# Altium PCB Controller.PcbDoc
Units mil, origin at the board's own origin, x right, y up, seen from the top; angles counter-clockwise.
Board outline 1365 x 1010 mil, 2 copper layers (Top Layer, Bottom Layer), stack 61.756 mil thick; 91 components, 54 nets, 229 pads, 266 vias.
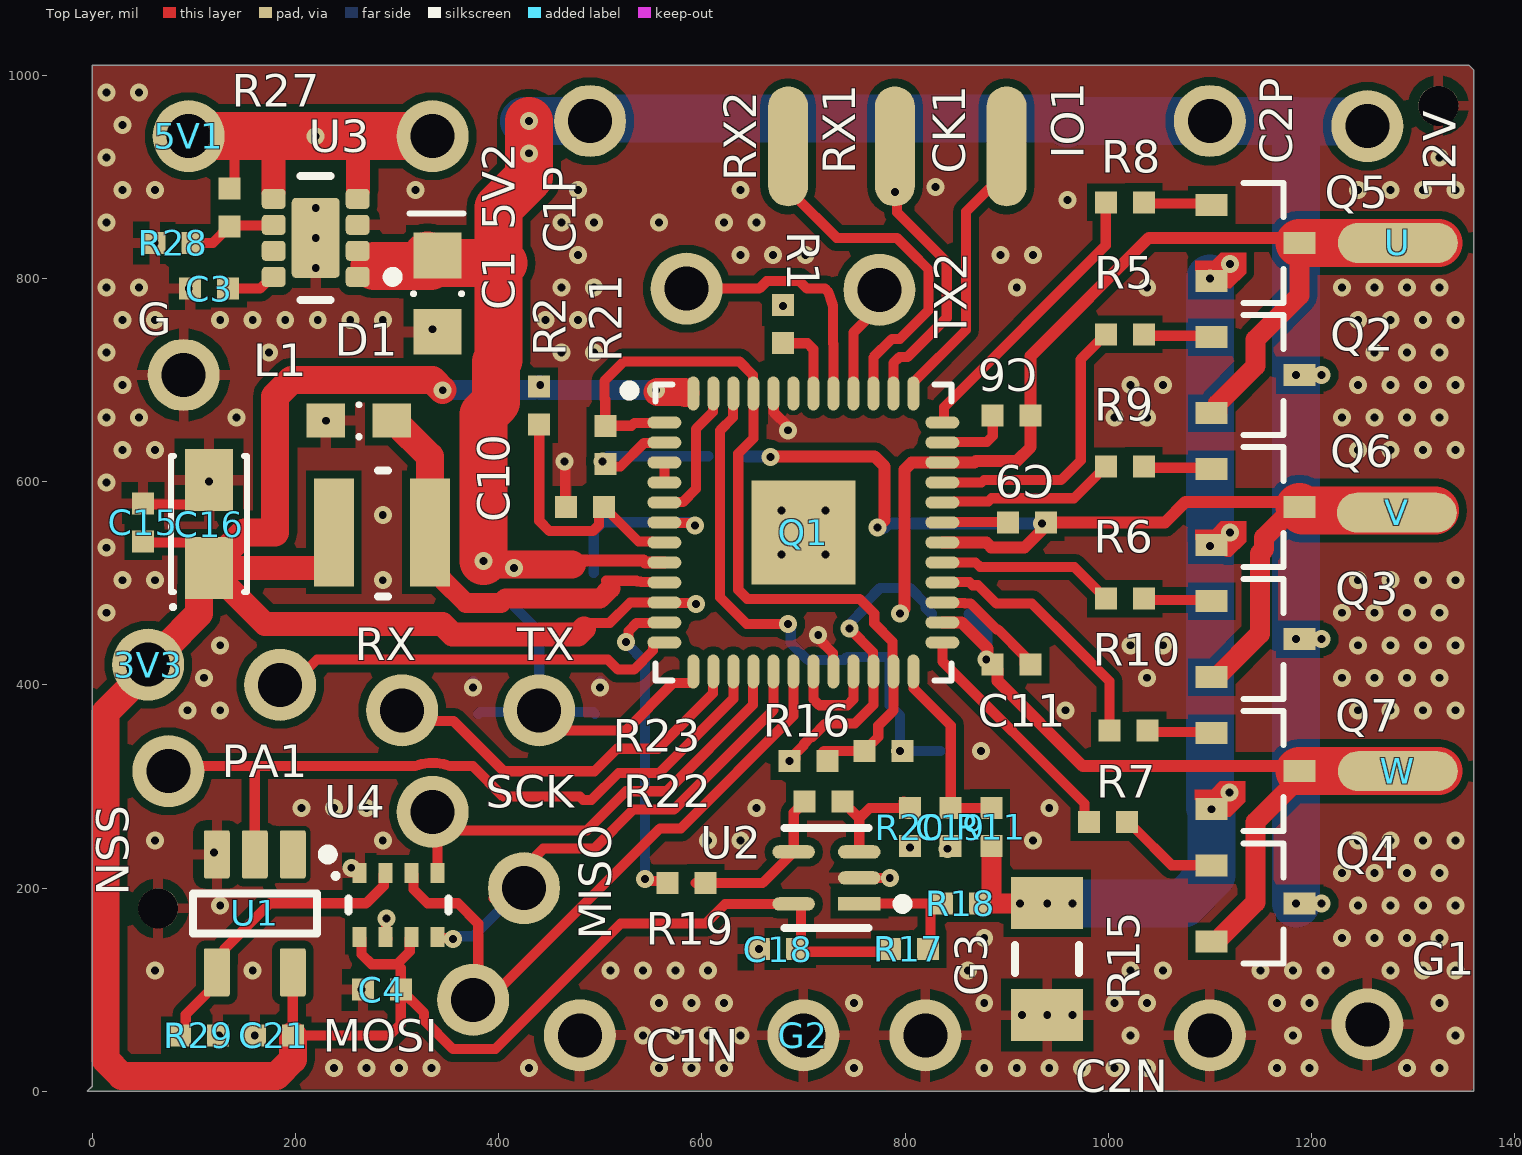
[diagram p0: Top Layer view]
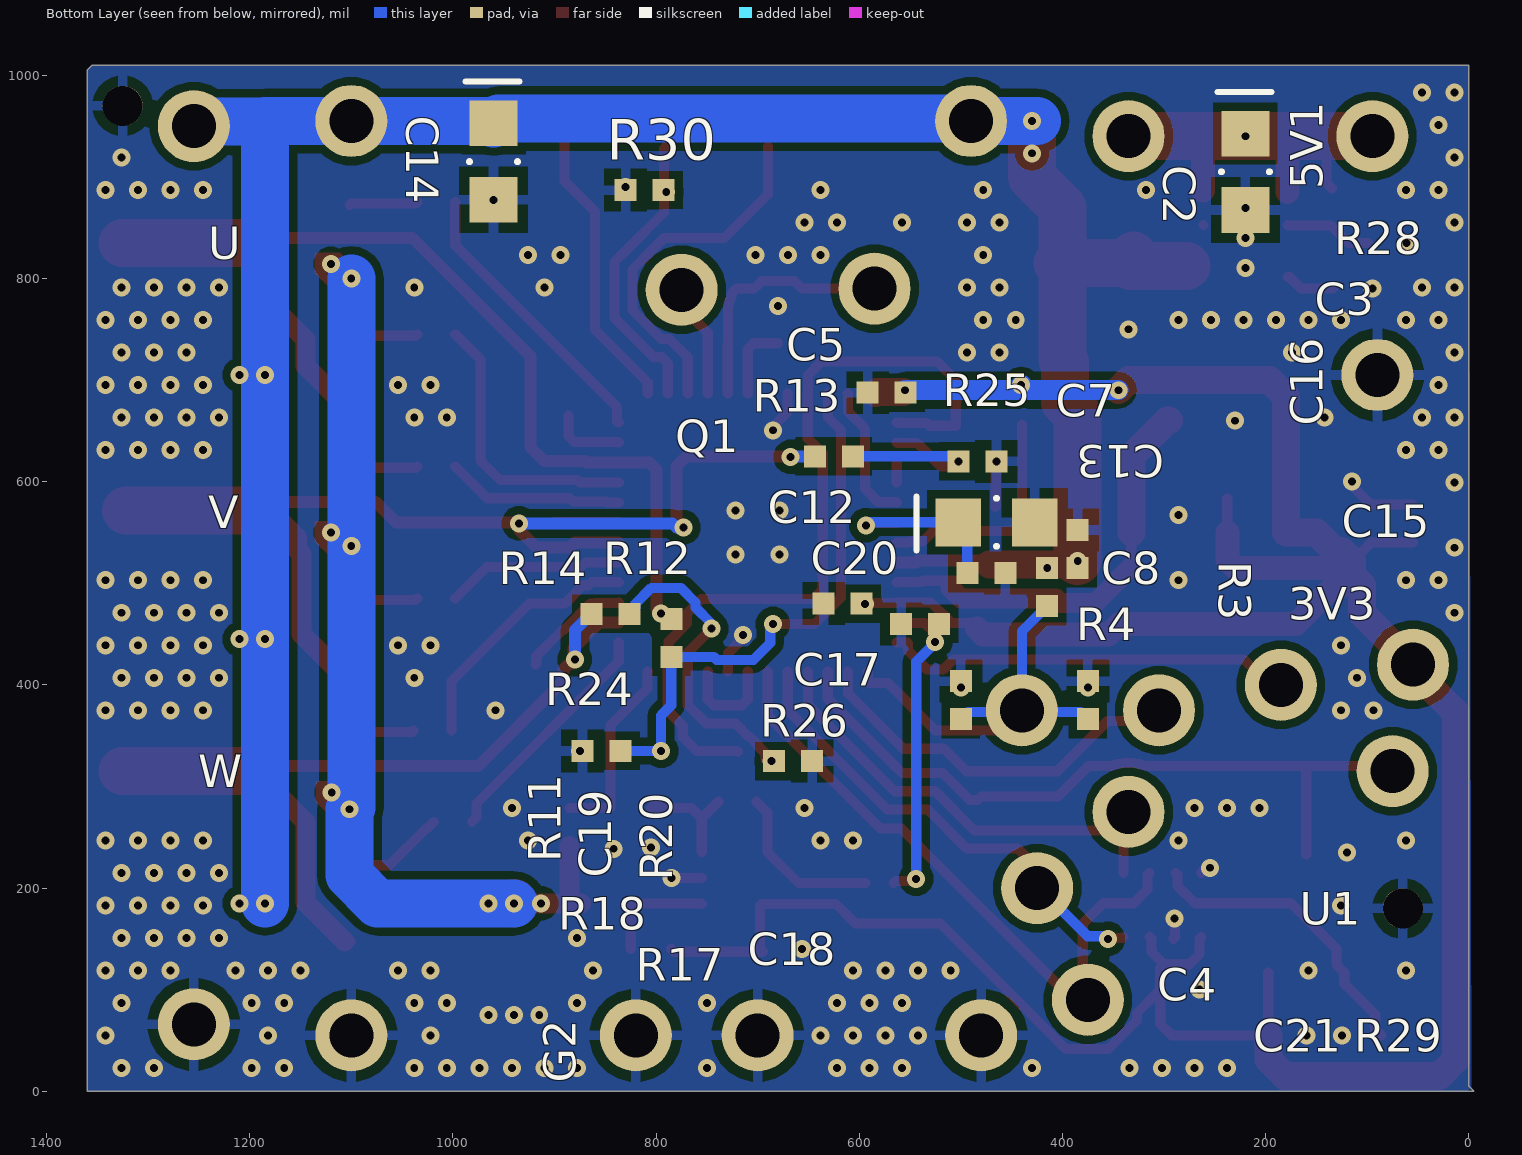
[diagram p1: Bottom Layer view, seen from below]

## Layer stack, top to bottom
Top Solder: solder mask 1, SM-001, Dk 4
Top Layer: signal copper 1.378
Dielectric 1: core 59, Core-043, Dk 4.3
Bottom Layer: signal copper 1.378
Bottom Solder: solder mask 1, SM-001, Dk 4

## Board outline
-5,0 0,5 0,1010 1355,1010 1360,1005 1360,0

## Design rules (kind name [scope] priority, off if disabled: settings)
Clearance Clearance_5 [InNetClass('RF') vs InNet('NetC28_1')] p1: gap=7.87 ignorepadtopadclearanceinfootprint=TRUE
Clearance Clearance_4 [InNetClass('RF') vs InNet('VDD_RFS')] p2: gap=7.87 ignorepadtopadclearanceinfootprint=TRUE
Clearance Clearance_3 [HasFootprint('vqfn28_6x6mm') vs InNet('VDD_RFS')] p3: gap=7.87 ignorepadtopadclearanceinfootprint=TRUE
Clearance Clearance_2 [((Not InAnyNet) And IsPad) vs InNet('GND')] p4: gap=4.72 ignorepadtopadclearanceinfootprint=FALSE
Clearance [InNetClass('RF') vs InNet('GND')] p5: gap=4.72 ignorepadtopadclearanceinfootprint=TRUE except(9.84: SMDPad-SMDPad SMDPad-THPad SMDPad-Via SMDPad-Fill SMDPad-Poly SMDPad-Region SMDPad-Text)
Clearance Clearance_1 [All] p6: gap=7.87 ignorepadtopadclearanceinfootprint=TRUE
MinimumSolderMaskSliver [All] p1: minsoldermaskwidth=0
PlaneClearance [InNetClass('RF')] p1: clearance=4.72
PolygonConnect PolygonConnect_1 [IsVia vs InNet('GND')] p1: connectstyle=Direct reliefconductorwidth=10 reliefentries=4 polygonreliefangle="90 Angle" airgapwidth=10
PolygonConnect [All] p2: connectstyle=Relief reliefconductorwidth=10 reliefentries=4 polygonreliefangle="90 Angle" airgapwidth=10
RoutingVias [All] p1: holewidth=7.8 width=17.7 viastyle="Through Hole" minholewidth=7.8 minwidth=17.7 maxholewidth=7.8 maxwidth=17.7
SilkToSolderMaskClearance [IsPad] p1: minsilkscreentomaskgap=6 clearancetoexposedcopper=TRUE
SolderMaskExpansion SolderMaskExpansion_1 [IsVIA] p1: expansion=4 istentingtop=TRUE
SolderMaskExpansion [All] p2: expansion=4 istentingtop=FALSE
Width Width_2 [InNetClass('hc')] p1: maxlimit=78.74 minlimit=11.81 preferedwidth=47.24
Width [All] p2: maxlimit=78.74 minlimit=10 preferedwidth=10
27 further rules are at their usual default settings.

## Classes and differential pairs
net class short: HSU HSV HSW LSU LSV LSW NetD1_2 NetQ2_G NetQ3_G NetQ4_G NetQ5_G NetQ6_G NetQ7_G
net class hc: NetQ5_S OUTU OUTV OUTW VBUS
component class esc: 3V3 5V1 5V2 12V C1 C1N C1P C2 C2N C2P C3 C4 C5 C6 C7 C8 C9 C10 C11 C12 C13 C14 C15 C16 C17 C21 CK1 D1 G G1 G2 G3 IO1 L1 MISO MOSI NSS PA1 q Q1 R1 R2 R3 R4 R27 R28 R29 R30 RX RX1 RX2 SCK TX TX2 U1 U3 U4
component class drivers: C18 C19 C20 Q2 Q3 Q4 Q5 Q6 Q7 R5 R6 R7 R8 R9 R10 R11 R12 R13 R14 R15 R16 R17 R18 R19 R20 R21 R22 R23 R24 R25 R26 U U2 V W

## Components (designator, comment, footprint, x,y, rotation, side; value= is the part's Value field where it differs from the comment)
3V3 "3V3" large_pin 55,420 r180 top
5V1 "5V1" large_pin 95,940 r90 top
5V2 "5V2" large_pin 335,940 r180 top
12V "12V" large_pin 1255,950 r90 top
C1 "TCJB226M025R0150" my_0805_pol 340,785 r270 top value="22uF 25V"
C1N "C1N" large_pin 480,55 r90 top
C1P "C1P" large_pin 490,955 r90 top
C2 "TCJB226M025R0150" my_0805_pol 220,905 r270 bottom value="22uF 25V"
C2N "C2N" large_pin 1100,55 r180 top
C2P "C2P" large_pin 1100,955 r180 top
C3 "3.3nF" MY_0402#1 115,790 r0 top value=4.7nF
C4 "100nF" MY_0402#1 285,100 r180 top
C5 "100nF" MY_0402#1 573.03,687.57 r180 bottom
C6 "470nF/25V" MY_0402#1 905,665 r0 top value=470nF
C7 "" MY_0805_pol 465,560 r180 bottom value="22uF 25V"
C8 "100nF" MY_0402#1 475,510 r0 bottom
C9 "470nF/25V" MY_0402#1 920,560 r0 top value=470nF
C10 "3.3nF" MY_0402#1 485,575 r180 top value=100nF
C11 "470nF/25V" MY_0402#1 905,420 r180 top value=470nF
C12 "100nF" MY_0402#1 616.3,480 r0 bottom
C13 "220nF/25V" MY_0402#1 385,533.7 r90 bottom value=100nF
C14 "" my_0805_pol 960,915 r270 bottom value="22uF 25V"
C15 "100nF" MY_0402#1 50,560 r270 top
C16 "" my_1206_pol 115,558.31 r90 top value="47uF 6.3V"
C17 "10nF" MY_0402#1 500,385 r90 bottom value=4.7nF
C18 "100nF" MY_0402#1 675,140 r180 top
C19 "10nF" MY_0402#1 845,260 r90 top
C20 "10nF" MY_0402#1 540,460 r180 bottom
C21 "100nF" MY_0402#1 178.7,55 r180 top
CK1 "CK" solder_pin_small 790,930 r180 top
D1 "CD0603-B0340R" my_0603 262.52,660 r0 top
G "G" large_pin 90,705 r180 top
G1 "G" large_pin 1255,65.85 r0 top
G2 "G" large_pin 700,55 r0 top
G3 "G" large_pin 820,55 r0 top
IO1 "IO" solder_pin_small 900,930 r180 top
L1 "74404032220" IND_3_3 285,550 r0 top value="22uH 0.6A"
MISO "MISO" large_pin 425,200 r180 top
MOSI "MOSI" large_pin 375,90 r180 top
NSS "NSS" large_pin 75,315 r180 top
PA1 "PA1" large_pin 185,400 r90 top
Q1 "STSPIN32F0A" VFQFPN48 700,550 r0 top
Q2 "IRLML0030TRPBF" Micro3 1145,705 r0 top
Q3 "IRLML0030TRPBF" Micro3 1145,445 r0 top
Q4 "IRLML0030TRPBF" Micro3 1145,185 r0 top
Q5 "IRLML0030TRPBF" Micro3 1145,835 r0 top
Q6 "IRLML0030TRPBF" Micro3 1145,575 r0 top
Q7 "IRLML0030TRPBF" Micro3 1145,315 r0 top
R1 "0R" MY_0402#1 680,755 r270 top value=10K
R2 "39k" MY_0402#1 440,675 r270 top value=10K
R3 "470k" MY_0402#1 415,496.3 r90 bottom value=10K
R4 "33k" MY_0402#1 375,385 r270 bottom value=10K
R5 "47" MY_0402#1 1016.3,745 r0 top value=50
R6 "47" MY_0402#1 1016.3,485 r0 top value=50
R7 "47" MY_0402#1 1000,265 r0 top value=50
R8 "47" MY_0402#1 1016.3,875 r0 top value=50
R9 "47" MY_0402#1 1016.3,615 r0 top value=50
R10 "47" MY_0402#1 1020,355 r0 top value=50
R11 "1k" MY_0402#1 885,260 r270 top value=50
R12 "10k" MY_0402#1 785,446.3 r90 bottom value=50
R13 "10k" MY_0402#1 625,625 r0 bottom value=50
R14 "10k" MY_0402#1 845,470 r0 bottom value=50
R15 "0.001 1206" MY_1206 940,130.12 r270 top value=50
R16 "10k" MY_0402#1 778.7,335 r180 top value=50
R17 "470k" MY_0402#1 803.7,140 r180 top value=50
R18 "180k" MY_0402#1 855,185 r0 top value=50
R19 "10k" MY_0402#1 585,205 r0 top value=50
R20 "1k" MY_0402#1 805,260 r270 top value=50
R21 "10k" MY_0402#1 505,636.3 r90 top value=50
R22 "24k" MY_0402#1 720,285 r0 top value=50
R23 "10k" MY_0402#1 705,325 r0 top value=50
R24 "1k" MY_0402#1 853.7,335 r180 bottom value=50
R25 "1k" MY_0402#1 483.7,620 r0 bottom value=50
R26 "1k" MY_0402#1 665,325 r0 bottom value=50
R27 "270k" MY_0402#1 135,870 r270 top value=10K
R28 "47k" MY_0402#1 80,835 r0 top value=10K
R29 "33k" MY_0402#1 105,55 r0 top value=10K
R30 "0R" MY_0402#2 811.3,887 r0 bottom value=10K
RX "RX" large_pin 305,375 r90 top
RX1 "RX" solder_pin_small 684.98,930 r180 top
RX2 "PA1" large_pin 585,790 r180 top
SCK "SCK" large_pin 335,275 r180 top
TX "RX" large_pin 440,375 r90 top
TX2 "TX2" large_pin 774.85,788.8 r180 top
U "U" solder_pin_small 1285,835 r270 top
U1 "SN74LVC1G04MDBVREP" DBV0005A_M 160,175 r270 top
U2 "LMV321LICT" FP-SOT323-5-IPC_C 722.72,210 r180 top
U3 "TPS82150SILR" FP-SIL0008D-MFG 220,840 r180 top
U4 "BMP280" BOSC-LGA-8_V 301.61,183.5 r0 top
V "V" solder_pin_small 1284.05,569.46 r90 top
W "W" solder_pin_small 1285,315 r90 top

## Footprints (in the part's own frame and the unit in brackets; to place one, negate y for a bottom-side part, rotate by r counter-clockwise, add the part's x,y. Pads: shape width x height; smd on the part's side, far side on the other; paste and mask are expansions set on the pad)
BOSC-LGA-8_V [mm] "LGA, 8-Leads, Body 2.5x2mm, Pitch 0.65mm"
  rect 0.35x0.5 smd: 1(-0.975,0.8) 2(-0.325,0.8) 3(0.325,0.8) 4(0.975,0.8) 5(0.975,-0.8) 6(0.325,-0.8) 7(-0.325,-0.8) 8(-0.975,-0.8)
  silkscreen extent -1.64,-0.16 1.25,0.79, body extent -1.25,-1 1.25,1, height 1
DBV0005A_M [mm] "SOT23, 5-Leads, Body 3.05x1.75mm, Pitch 0.95mm, IPC Low Density"
  rrect15% 1.2x0.65 smd: 1(-1.475,0.95) 2(-1.475,0) 3(-1.475,-0.95) 4(1.475,-0.95) 5(1.475,0.95)
  silkscreen extent -1.6,-1.55 0.5,1.95, body extent -1.42,-1.46 1.42,1.46, height 1.08
FP-SIL0008D-MFG [mm]
  rrect40% 0.6x0.5 smd: 1(-1.05,0.975) 2(-1.05,0.325) 3(-1.05,-0.325) 4(-1.05,-0.975) 5(1.05,-0.975) 6(1.05,-0.325) 7(1.05,0.325) 8(1.05,0.975)
  rrect17% 1.2x2 smd: 9(0,0)
  silkscreen extent -2.05,-1.55 0.38,1.55, body extent -1.55,-1.65 1.55,1.65, height 0.25
FP-SOT323-5-IPC_C [mm]
  rect 1.064x0.336 smd: 1(-0.82,0.65)
  rrect100% 1.064x0.336 smd: 2(-0.82,0) 3(-0.82,-0.65) 4(0.82,-0.65) 5(0.82,0.65)
  silkscreen extent -2.03,-1.25 1.05,1.25, body extent -1.45,-1.1 1.45,1.1, height 0.25
IND_3_3 [mm]
  rect 1x2.7 smd: 1(-1.2,0) 2(1.2,0)
  silkscreen extent -0.1,-1.6 0.15,1.55, body extent -2,-1.65 2,1.65, height 2.5
large_pin [mm]
  round 1.8 hole 1.1: 1(0,0)
Micro3 [mm] "SOT23, 3-Leads, Body 2.92x2.37mm, Pitch 0.95mm, IPC High Density"
  rect 0.8x0.55 smd: D(1.1,0) G(-1.1,0.95) S(-1.1,-0.95)
  silkscreen extent -0.3,-1.5 0.7,1.5, body extent -1.32,-1.52 1.32,1.52, height 1.12
MY_0402#1 [mm] "Chip Resistor, 2-Leads, Body 1.00x0.50mm, IPC Medium Density"
  rect 0.55x0.55 smd: 1(-0.475,0) 2(0.475,0)
  body extent -0.5,-0.25 0.5,0.25, height 0.5
MY_0402#2 [mm] "Chip Resistor, 2-Leads, Body 1.00x0.50mm, IPC Medium Density"
  rect 0.55x0.55 smd mask+0: 1(-0.475,0) 2(0.475,0)
  body extent -0.5,-0.25 0.5,0.25, height 0.5
my_0603 [mm] "0603 without silkscreen issues"
  rect 0.965x0.85 smd: 1(-0.825,0) 2(0.825,0)
  silkscreen extent -0.01,-0.41 0.01,0.41, body extent -0.8,-0.4 0.8,0.4, height 3
my_0805_pol [mm] "0805 without silkscreen issues"
  rect 1.14x1.2 smd: 1(-0.955,0) 2(0.955,0)
  silkscreen extent -2,-0.7 0.01,0.65, body extent -1,-0.6 1,0.6, height 4
MY_0805_pol [mm] "0805 without silkscreen issues"
  rect 1.14x1.2 smd: 1(-0.955,0) 2(0.955,0)
  silkscreen extent -2,-0.7 0.01,0.65, body extent -1,-0.6 1,0.6, height 4
MY_1206 [mm]
  rect 1.3x1.8 smd: 1(-1.4,0) 2(1.4,0)
  silkscreen extent -0.35,-0.8 0.35,0.8, body extent -1.7,-0.9 1.7,0.9, height 0.5
my_1206_pol [mm] "Molded Capacitor, 2-Leads, Body 3.20x1.65mm, IPC High Density"
  rect 1.55x1.2 smd: 1(-1.1,0) 2(1.1,0)
  silkscreen extent -2.12,-0.95 1.7,0.95, body extent -1.7,-0.9 1.7,0.9, height 1.6
solder_pin_small [mm] "pin for soldering"
  oval 1x3 smd: 1(0,0)
VFQFPN48 [mm] "QFN, 48-Leads, Body 7.00x7.00mm, Pitch 0.50mm, Thermal Pad 2.60x2.60mm, IPC Medium Density"
  oval 0.85x0.3 smd: 1(-3.475,2.75) 2(-3.475,2.25) 3(-3.475,1.75) 4(-3.475,1.25) 5(-3.475,0.75) 6(-3.475,0.25) 7(-3.475,-0.25) 8(-3.475,-0.75) 9(-3.475,-1.25) 10(-3.475,-1.75) 11(-3.475,-2.25) 12(-3.475,-2.75) 25(3.475,-2.75) 26(3.475,-2.25) 27(3.475,-1.75) 28(3.475,-1.25) 29(3.475,-0.75) 30(3.475,-0.25) 31(3.475,0.25) 32(3.475,0.75) 33(3.475,1.25) 34(3.475,1.75) 35(3.475,2.25) 36(3.475,2.75)
  oval 0.3x0.85 smd: 13(-2.75,-3.475) 14(-2.25,-3.475) 15(-1.75,-3.475) 16(-1.25,-3.475) 17(-0.75,-3.475) 18(-0.25,-3.475) 19(0.25,-3.475) 20(0.75,-3.475) 21(1.25,-3.475) 22(1.75,-3.475) 23(2.25,-3.475) 24(2.75,-3.475) 37(2.75,3.475) 38(2.25,3.475) 39(1.75,3.475) 40(1.25,3.475) 41(0.75,3.475) 42(0.25,3.475) 43(-0.25,3.475) 44(-0.75,3.475) 45(-1.25,3.475) 46(-1.75,3.475) 47(-2.25,3.475) 48(-2.75,3.475)
  rect 2.6x2.6 smd: EPAD(0,0)
  silkscreen extent -4.47,-3.7 3.7,3.7, body extent -3.55,-3.55 3.55,3.55, height 0.95

## Part data
3V3 5V1 5V2 12V C1N C1P C2N C2P CK1 G G1 G2 G3 IO1 MISO MOSI NSS PA1 RX RX1 RX2 SCK TX TX2 U V W: library part Socket, "Socket", LatestRevisionDate=17-Jul-2002, LatestRevisionNote="Re-released for DXP Platform.", Publisher="Altium Limited"
C1 C2 C7 C14 C16: library part "Cap Pol3", "Polarized Capacitor (Surface Mount)", LatestRevisionDate=29-May-2009, LatestRevisionNote="IPC-7351 Footprint Added.", PackageDescription="Chip Capacitor", PackageReference=C0805, Published=8-Jun-2000, Publisher="Altium Limited"
C3 C4 C5 C6 C8 C9 C10 C11 C12 C13 C15 C17 C18 C19 C20 C21: library part Cap, "Capacitor", LatestRevisionDate=17-Jul-2002, LatestRevisionNote="Re-released for DXP Platform.", PackageDescription="Radial Cap, Thru-Hole; 2 Leads; 0.3 in Pin Spacing", PackageReference=RAD-0.3, Published=8-Jun-2000, Publisher="Altium Limited"
D1: library part Diode, "Default Diode", Code_JEDEC=DO-214-AB, LatestRevisionDate=17-Jul-2002, LatestRevisionNote="Re-released for DXP Platform.", PackageDescription="DO-214-AB/SMC; 2 C-Bend Leads; Body 7.9 x 5.9 mm, inc. leads (LxW)", PackageReference=SMC, PackageVersion=Sep-1996, Published=8-Jun-2000, Publisher="Altium Limited"
L1: library part Inductor, "Inductor", Code_IEC=1005, Code_JEITA=0402, LatestRevisionDate=29-May-2009, LatestRevisionNote="IPC-7351 Footprint Added.", PackageDescription="Chip Inductor", PackageReference=0402-A, Published=8-Jun-2000, Publisher="Altium Limited"
Q2 Q3 Q4 Q5 Q6 Q7: library part MOSFET-N, "N-Channel MOSFET", LatestRevisionDate=17-Jul-2002, LatestRevisionNote="Re-released for DXP Platform.", PackageDescription="TO, Flat Index; 3 In-Line, Axial Leads; Body Dia. 4.6mm; Lead Dia. 0.5 mm (max)", PackageReference=E3, PackageVersion=1995/1996, Published=8-Jun-2000, Publisher="Altium Limited"
R1 R2 R3 R4 R5 R6 R7 R8 R9 R10 R11 R12 R13 R14 R15 R16 R17 R18 R19 R20 R21 R22 R23 R24 R25 R26 R27 R28 R29 R30: library part Res3, "Resistor", LatestRevisionDate=29-May-2009, LatestRevisionNote="IPC-7351 Footprint Added.", PackageDescription="Chip Resistor", PackageReference=J1-0603, Published=8-Jun-2000, Publisher="Altium Limited"
U1: library part CMP-0859-00138-3, "Enhanced Product Single Inverter Gate, DBV0005A, LARGE T&R", F @ Nom Voltage(Max)(Mhz)=150, Generic Part Number=SN74LVC1G04-EP, ICC @ Nom Voltage(Max)(mA)=0.01, Manufacturer="Texas Instruments", Operating Temperature Range(C)="-55 to 125", Rating="HiRel Enhanced Product", tpd @ Nom Voltage(Max)(ns)=13.9,8,5.7,4.5, Voltage(Nom)(V)=1.8,2.5,3.3,5, 3-State Output=No, Bits(#)=1, DatasheetVersion=SCES691A, Input Type=CMOS/TTL, Logic=Inverting, Output Drive (IOL/IOH)(Max)(mA)=32/-32, Output Type=CMOS, PackageReference=DBV0005A, Schmitt Trigger=No, Sub-Family="Inverting Buffer/Driver", Technology Family=LVC, VCC(Max)(V)=5.5, VCC(Min)(V)=1.65
U2: library part CMP-12131-000006-1, "IC OPAMP GP 1 CIRCUIT SC70-5", Ambient Temperature Range High=+125°C, Ambient Temperature Range Low=-40°C, Input Bias Current=0.027uA, Input Offset Voltage=1mV, Manufacturer=STMicroelectronics, Max Junction Temp=+150°C, Max Supply Voltage=5.5V, Min Supply Voltage=2.7V, Nominal Supply Current=120-130uA, Output Current Per Channel=43mA, Package=SOT323-5, Temperature="-40°C to +125°C", Voltage Gain=100dB, Automotive=No, Category=IC, ComponentLink2Description=Datasheet, ComponentLink2URL=https://www.st.com/resource/en/datasheet/lmv321l.pdf, Device Class L1="Integrated Circuits (ICs)", Device Class L2="Linear ICs", Device Class L3="Amplifiers - Op Amps", Digikey Description="IC OPAMP GP 1 CIRCUIT SC70-5", Gain Bandwidth=1.3MHz, Height=1.1mm, Ipc Land Pattern Name=SOT65P210X95-5, Lead Free=Yes, Manufacturer Part Number=LMV321LICT, Mouser Description="Operational Amplifiers - Op Amps 1.3MHz LP Gen Op-Amp 250uA at 5V 7mV 25c", Number Of Channels=1, Octopart=https://octopart.com/lmv321lict-stmicroelectronics-23014003, RoHS=TRUE, Temperature Range High=+125°C, Temperature Range Low=-40°C
U3: library part CMP-04918-000050-1, "DC DC CONVERTER 0.9-6V", Manufacturer="Texas Instruments", Max Junction Temp=+110°C, Max Supply Voltage=17V, Min Supply Voltage=3V, Nominal Supply Current=20uA, Output Current=1A, Output Voltage=0.9-6V, Package=SIL0008D, Switching Frequency=2MHz, Temperature="-40°C to +125°C", Temperature Range High=+125°C, Temperature Range Low=-40°C, Automotive=No, Category=IC, ComponentLink2Description=Datasheet, ComponentLink2URL=http://www.ti.com/lit/ds/symlink/tps82150.pdf, Device Class L1="Integrated Circuits (ICs)", Device Class L2="Power Management ICs", Device Class L3="Voltage Regulators - Switching", Digikey Description="DC DC CONVERTER 0.9-6V", Height=1.53mm, Lead Free=Yes, Manufacturer Part Number=TPS82150SILR, Max Duty Cycle=100%, Number Of Outputs=1, Octopart=https://octopart.com/tps82150silr-texas+instruments-83003514, Output Type=AdjustableProgrammable, RoHS=TRUE, Switching Topology=Buck
U4: library part CMP-2000-05076-1, "Digital Pressure Sensor, 1.71 to 3.6 V, -40 to 85 degC, 8-Pin LGA, RoHS, Tape and Reel", Manufacturer="Bosch Sensortec", Datasheet URL=http://datasheet.octopart.com/BMP280-Bosch-datasheet-41546027.pdf, Datasheet Version="Rev. 1.14, 05/2015", Manufacturer URL=http://www.bosch-sensortec.com

## Free pads (board coordinates)
  round 39.37 hole 39.37 paste+0 mask+4: 11(1325,970) 12(65,180)

## Via types
v1: diameter 17.7, hole 7.8, Top Layer to Bottom Layer, tented both sides, 266 vias

## Nets (pads, with @x,y where several pads share a name; then routed paths per layer and width w, separated by ;. In a path a pad name is that pad's centre, name@x,y a point inside that pad or via, vN(x,y) a via of type N, cw(c..) or ccw(c..) an arc to the next point about the centre after c; other vN are vias at no path point)
5V: 5V1.1 5V2.1 C2.1 R27.1 U3.4 U3.5 | length 405.2
  Top Layer w10: R27.1 140,893.7 140,940
  Top Layer w23.62: U3.5@178.66,885 178.66,938.66 180,940 ; U3.4@261.85,886.49 261.85,940.15
  Top Layer w47.24: 5V1.1 140,940 180,940 v1(220,940) 5V2.1
  Bottom Layer w10: v1(220,940) C2.1
CSENSE: C20.2 Q1.11 R19.1 | length 315.5
  Top Layer w10: v1(525.34,442.04) 527.95,444.64 527.95,453.08 535.94,461.07 562.84,461.07 Q1.11 ; v1(544,209.09) 546.05,207.05 564.25,207.05 R19.1
  Bottom Layer w10: v1(525.34,442.04) 525.34,441.45 544,422.79 v1(544,209.09)
GND: C1.2 C1N.1 C2.2 C2N.1 C3.1 C4.2 C5.1 C7.2 C8.1 C10.2 C12.2 C13.2 C14.2 C15.1 C16.2 C17.2 C18.2 C19.1 C20.1 C21.2 D1.1 G1.1 G2.1 G3.1 G.1 pad.11 pad.12 Q1.20 Q1.44 Q1.EPAD R1.1 R4.1 R15.2 R20.2 R24.1 R25.1 R26.1 R28.1 R29.2 R30.2 U1.3 U2.2 U3.3 U3.9 U4.1 U4.7 | length 301.1
  Top Layer w10: C15.1@55,577.4 96.38,577.4 115,596.02 v1(115,600) ; v1(95,790) C3.1 ; v1(120,235) 120.67,235 U1.3 ; R29.2 v1(125,55) ; v1(255,220) 257.5,217.5 261.34,217.5 263.23,215.61 U4.1 ; v1(265,100) C4.2 ; v1(289.67,170.15) 289.25,169.73 289.25,152.43 U4.7 U4.7@290.71,150.12 ; C1.2@335,747.4 v1(335,750) ; v1(465,620) 465.65,619.35 465.65,575.65 C10.2 ; Q1.44 670.82,686.46 670.82,668.46 685,654.28 v1(685,650.59) ; v1(680,772.72) R1.1 ; v1(714.59,449.21) 714.59,445.83 729.18,431.24 729.18,413.54 Q1.20 ; U2.2 v1(785,210) v1@787.61,212.61 ; v1(805,240) R20.2 ; v1(841.69,238.7) 842.4,238.7 C19.1
  Bottom Layer w10: C2.2@220,865 C2.2 ; v1(375,397.56) R4.1 ; v1(500,397.56) C17.2 ; R24.1 v1(875,335)
  other v1: 238,23 270,23 302,23 334,23 430,23 558,23 590,23 622,23 750,23 878,23 910,23 942,23 974,23 1006,23 1038,23 1166,23 1198,23 1294,23 1326,23 160,55 542,55 574,55 606,55 638,55 1022,55 1182,55 1342,55 915,75 940,75 965,75 558,87 590,87 622,87 750,87 878,87 1006,87 1038,87 1166,87 1198,87 1326,87 62,119 158,119 510,119 542,119 574,119 606,119 862,119 1022,119 1054,119 1150,119 1182,119 1214,119 1278,119 1310,119 1342,119 656.3,140 878,151 1230,151 1262,151 1294,151 1326,151 126,183 1246,183 1278,183 1310,183 1342,183 1230,215 1262,215 1294,215 1326,215 62,247 286,247 606,247 638,247 926,247 1246,247 1278,247 1310,247 1342,247 206,279 238,279 270,279 654,279 942,279 94,375 126,375 958,375 1246,375 1278,375 1310,375 1342,375 110,407 1038,407 1230,407 1262,407 1294,407 1326,407 126,439 1022,439 1054,439 1246,439 1278,439 1310,439 1342,439 14,471 1230,471 1262,471 1294,471 1326,471 30,503 62,503 286,503 1246,503 1278,503 1310,503 1342,503 678.35,528.35 721.65,528.35 14,535 286,567 678.35,571.65 721.65,571.65 14,599 30,631 62,631 1246,631 1278,631 1310,631 1342,631 230,660 14,663 46,663 142,663 1006,663 1038,663 1230,663 1262,663 1294,663 1326,663 30,695 1022,695 1054,695 1246,695 1278,695 1310,695 1342,695 14,727 174,727 462,727 494,727 1262,727 1294,727 1326,727 30,759 62,759 126,759 158,759 190,759 222,759 254,759 286,759 446,759 478,759 1246,759 1278,759 1310,759 1342,759 14,791 46,791 462,791 494,791 910,791 1038,791 1230,791 1262,791 1294,791 1326,791 220,810.47 478,823 638,823 670,823 702,823 894,823 926,823 61.3,835 220,840 14,855 462,855 494,855 558,855 622,855 654,855 220,869.53 960,877.4 30,887 62,887 318,887 478,887 638,887 1246,887 1278,887 1310,887 1342,887 830,890 14,919 1326,919 30,951 14,983 46,983
HSU: Q1.33 R5.1 | length 279.5
  Top Layer w10: Q1.33 875.37,599.21 877.74,601.57 953.67,601.57 972.96,620.86 972.96,720.36 R5.1
HSV: Q1.29 R6.1 | length 173.4
  Top Layer w10: Q1.29 869.39,520.47 872.43,517.43 ; 873.92,515.94 966.65,515.94 R6.1
HSW: Q1.25 R7.1 | length 236.6
  Top Layer w10: Q1.25 836.81,423.19 976.72,283.28 976.72,269.58 R7.1
LSU: Q1.36 R8.1 | length 283.7
  Top Layer w10: Q1.36 837.48,658.27 838.32,659.1 838.32,673.32 997.6,832.6 R8.1
LSV: Q1.32 R9.1 | length 175.5
  Top Layer w10: Q1.32 848.13,579.53 849.03,580.43 881.87,580.43 885.14,583.7 966.3,583.7 R9.1
LSW: Q1.28 R10.1 | length 253.7
  Top Layer w10: Q1.28 837.14,501.12 863.46,501.12 866.51,498.07 871.93,498.07 890,480 925,480 965,440 1001.3,403.7 R10.1
MISO: MISO.1 Q1.17 U4.5 | length 496.7
  Top Layer w10: U4.5 341,151 354.31,151 v1(355.32,150) ; MISO.1@395,190 443.84,238.84 494.12,238.84 532.78,277.5 572.78,277.5 670.47,375.19 Q1.17
  Bottom Layer w10: v1(355.32,150) 357.92,152.61 375.11,152.61 422.5,200 MISO.1
MOSI: MOSI.1 Q1.18 U4.3 | length 646.4
  Top Layer w10: U4.3 316.3,213.11 316.3,198.7 330,185 360,185 380,165 380,95 MOSI.1 380,90 390,90 558.7,258.7 579.26,258.7 690.16,369.6 Q1.18
NetC3_2: C3.2 U3.8 | length 49.8
  Top Layer w10: C3.2 165.08,790 176.69,801.61 U3.8
NetC6_1: C6.1 Q1.35 | length 72.1
  Top Layer w10: Q1.35 837.16,638.93 861.97,638.93 862.18,639.13 880.43,639.13 886.3,645 C6.1
NetC7_1: C7.1 C8.2 Q1.6 | length 176.9
  Top Layer w10: Q1.6 563.54,559.5 590.87,559.5 v1(593.32,557.05)
  Bottom Layer w10: C8.2 493.7,551.1 C7.1 590.36,560 v1(593.32,557.05)
NetC9_1: C9.1 Q1.31 | length 63.4
  Top Layer w10: Q1.31 837.16,560.19 C9.1@900.08,560.19
NetC10_1: C10.1 Q1.7 R2.2 | length 254
  Top Layer w10: R2.2 440,561.44 450.14,551.3 492.82,551.3 498.68,557.16 498.68,569.98 C10.1 537.64,541.06 550.97,541.06 551.87,540.16 Q1.7
NetC11_1: C11.1 Q1.27 | length 111.6
  Top Layer w10: Q1.27 837.16,480.76 858.55,480.76 859.11,480.2 864.53,480.2 890.2,454.52 891.64,454.52 917.87,428.29 917.87,420.83 C11.1@918.7,420
NetCK1_1: CK1.1 Q1.38 R30.1 | length 290.6
  Top Layer w10: Q1.38 788.58,716.76 794.44,722.62 802.27,722.62 841.03,761.39 841.03,816.21 828.48,828.76 792.25,865 792.25,927.75 CK1.1
  other v1: 790,885
NetD1_2: D1.2 L1.2 Q1.9 | length 417.3
  Top Layer w10: L1.2@332.24,516.54 L1.2 ; 505.64,502.56 535.56,502.56 536.43,501.69 539.79,501.69 540.35,501.13 562.84,501.13 Q1.9
  Top Layer w19.68: L1.2@332.24,516.54 343.66,505.12 343.66,504.77 367.88,480.55 402.12,480.55 406.57,485 500,485 510,495
  Top Layer w27.56: D1.2 297.26,660 332.24,625.02 L1.2
NetIO1_1: IO1.1 Q1.37 | length 282
  Top Layer w10: Q1.37 808.27,697.64 860,749.37 860,865.63 890,895.63 IO1.1@890,935
NetPA1_1: PA1.1 Q1.12 | length 435
  Top Layer w10: PA1.1@160,395 191.29,395 221.29,425 507.47,425 517.47,415 533.21,415 552.02,433.8 552.02,440.9 552.85,441.73 Q1.12
NetQ1_3: Q1.3 Q1.4 | length 19.7
  Top Layer w10: Q1.4 Q1.3
NetQ1_5: Q1.5 Q1.47 | length 137.6
  Top Layer w10: Q1.5 563.54,579.87 581.24,579.87 594.25,592.89 594.25,651.95 611.07,668.76 611.07,686.46 Q1.47
NetQ1_14: Q1.14 RX.1 | length 384.4
  Top Layer w10: RX.1 315.43,364.57 355.43,364.57 405,315 494.44,315 516.57,337.13 556.57,337.13 611.07,391.63 611.07,412.84 Q1.14
NetQ1_19: Q1.19 Q1.21 | length 98.9
  Top Layer w10: Q1.19 709.84,385.86 715.7,380 743.35,380 749.21,385.86 Q1.21
NetQ1_39: Q1.39 RX1.1 | length 360.1
  Top Layer w10: RX1.1@690,930 690,882.68 732.68,840 791.97,840 805.29,826.68 823.16,808.81 823.16,768.79 794.86,740.49 787.04,740.49 768.9,722.35 Q1.39
NetQ1_40: Q1.40 TX2.1 | length 112.6
  Top Layer w10: Q1.40 749.21,746.69 774.85,772.33 TX2.1
NetQ1_41: Q1.41 RX2.1 | length 247.8
  Top Layer w10: RX2.1 656.44,790 663.84,797.4 696.16,797.4 703.56,790 721.36,790 724.26,787.09 cw(c717.21,780) 724.32,787.04 728.67,774.52 cw(c719.23,771.24) 729.23,771.24 729.23,735.85 729.53,735.55 Q1.41
NetQ1_42: Q1.42 R1.2 | length 75.9
  Top Layer w10: R1.2 703.98,736.3 709.84,730.44 Q1.42
NetQ2_G: Q2.G R5.2 | length 67.8
  Top Layer w10: R5.2 1036.3,743.7 1100.39,743.7 Q2.G
NetQ3_G: Q3.G R6.2 | length 67.8
  Top Layer w10: R6.2 1036.3,483.7 1100.39,483.7 Q3.G
NetQ4_G: Q4.G R7.2 | length 100.6
  Top Layer w10: R7.2 1024.53,259.17 1025.83,259.17 1062.6,222.4 Q4.G
NetQ5_G: Q5.G R8.2 | length 67.8
  Top Layer w10: R8.2 1036.3,873.7 1100.39,873.7 Q5.G
NetQ5_S: Q5.S Q6.S Q7.S R11.2 R15.1 R18.2 | length 884
  Top Layer w19.68: R18.2 885,185 ; R11.2 885,185 ; v1(940,185) 885,185
  Top Layer w47.24: v1(940,185) R15.1
  Bottom Layer w47.24: v1(940,185) 1074.02,185 1101.69,212.68 v1(1101.69,277.6) 1100,279.29 v1(1100,536.61) v1(1100,800)
  other v1: 913.19,184.94 965,184.76 1119.26,294.04 1120,550 1120,814.41
NetQ6_G: Q6.G R9.2 | length 67.8
  Top Layer w10: R9.2 1036.3,613.7 1100.39,613.7 Q6.G
NetQ7_G: Q7.G R10.2 | length 64.1
  Top Layer w10: R10.2 1040,353.7 1100.39,353.7 Q7.G
NetR17_1: R17.1 R18.1 U2.1 | length 114.7
  Top Layer w10: U2.1 755.3,184.7 824.7,184.7 825,184.41 825,179.41 825,145 R17.1@825,140
NetR19_2: R19.2 R22.1 U2.4 | length 163
  Top Layer w10: R19.2@594.03,205 R19.2 659.84,205 U2.4 690.43,274.13 R22.1
NetR20_1: R20.1 R22.2 U2.3 | length 119.2
  Top Layer w10: R22.2 755,268.7 ; U2.3 755,268.7 ; R20.1@798.7,285 R20.1 765,278.7 755,268.7
NetR27_2: R27.2 R28.2 U3.6 | length 87.3
  Top Layer w10: R28.2 118.7,835 R27.2 135.75,852.05 177.91,852.05 U3.6
NetR29_1: R29.1 U1.4 U4.2 | length 299.3
  Top Layer w10: R29.1 92.13,60.83 92.13,75.63 122.6,106.1 U1.4 130.39,124.72 130.39,140.39 175,185 269.61,185 286.93,202.32 286.93,213.11 U4.2
NSS: NSS.1 Q1.15 U1.2 | length 742.5
  Top Layer w10: NSS.1@72.5,287.5 NSS.1@95,310 ; NSS.1@90,320 160,320 ; U1.2 160,320 ; Q1.15 631.1,386.38 567.65,322.93 564.72,320 557.97,313.25 517.97,313.25 491.5,286.78 483.22,286.78 480,290 404.72,290 374.72,320 352.57,320 ccw(c335,275) 317.43,320 160,320
OCCOMP: C19.2 Q1.24 R11.1 | length 189.7
  Top Layer w10: Q1.24 808.61,412.84 808.61,396.39 845,360 C19.2 R11.1
OP1N: Q1.22 R14.1 R23.1 R26.2 | length 306.3
  Top Layer w10: R23.1@690,325 692.13,327.13 692.13,332.13 700,340 700,341.16 707.54,348.7 708.7,348.7 722.13,362.13 750.76,362.13 768.9,380.27 Q1.22 768.55,413.54 768.55,432.25 v1(745.49,455.32)
  Bottom Layer w10: v1(745.49,455.32) 745.49,460.49 761.3,476.3 761.3,481.16 775.64,495.5 804.59,495.5 820.47,479.62 820.47,475.83 R14.1
  other v1: 686.3,325
OP1P: Q1.1 Q1.23 Q1.45 R16.2 R21.2 R23.2 | length 821
  Top Layer w10: Q1.1 562.84,657.92 533.75,657.92 530.83,655 R21.2 505,680.83 504.14,681.68 504.14,699.14 523.43,718.43 636.87,718.43 650.44,704.86 650.44,687.16 Q1.45 650.79,642.5 635.94,627.66 635.94,534.33 635.94,493.49 644.75,484.68 755.22,484.68 769.69,470.22 769.69,460.59 787.68,442.6 787.68,426.46 788.24,426.46 788.24,424.85 788.58,424.51 Q1.23 788.58,374.67 773.7,359.79 773.7,348.7 R16.2 720.28,335 R23.2@719.49,334.21
OP2N: Q1.2 R13.1 R21.1 R25.2 | length 178.6
  Top Layer w10: v1(502.4,620) 507.4,615 520,615 543.24,638.24 562.84,638.24 Q1.2
  Bottom Layer w10: v1(502.4,620) 507.4,625 R13.1
OP3N: Q1.46 R12.1 R16.1 R24.2 | length 548.4
  Top Layer w10: Q1.46 630.76,686.46 630.76,663.17 618.07,650.49 618.07,486.08 644.15,460 v1(685,460) ; v1(795,335) R16.1
  Bottom Layer w10: v1(685,460) 687.61,457.39 687.61,441.28 704.37,424.53 740.23,424.53 743.31,427.6 R12.1 785,380 795,370 v1(795,335) R24.2
OUTU: C6.2 Q1.34 Q2.S Q5.D R12.2 U.1 | length 1024.9
  Top Layer w11.81: v1(795.09,470.09) 799.69,474.69 799.69,611.98 806.6,618.9 Q1.34 868.5,618.9 869.96,620.35 910,620.35 923.7,634.06 C6.2 923.7,723.7 1040,840 1171.55,840 1171.62,839.92 1183.39,839.92 Q5.D ; Q2.S 1103.66,667.6 Q2.S@1103.66,668.58
  Top Layer w19.68: Q2.S@1103.66,668.58 1107.6,668.58 1107.6,676.46 1145,713.86 1145,740 1188.31,783.31 Q5.D
  Top Layer w47.24: Q5.D U.1 U.1@1325,835
OUTV: C9.2 Q1.30 Q3.S Q6.D R13.2 V.1 | length 1087.9
  Top Layer w11.81: v1(667.56,624.36) 668.19,625 770,625 780,615 780,561.92 v1(773.08,555) ; Q1.30 880,540.16 884.76,535.39 917.83,535.39 933.78,551.34 933.78,555.08 C9.2@936.18,557.48 ; v1(935,559.02) 935.98,560 C9.2 1056,560 1076,580 1171.55,580 1171.62,579.92 1183.39,579.92 Q6.D Q6.D@1183.39,575 ; Q3.S Q3.S@1106.61,407.6
  Top Layer w19.68: Q3.S@1106.61,407.6 1149.23,450.21 1149.23,529.39 1153.46,533.62 1153.46,545.08 Q6.D@1183.39,575
  Top Layer w47.24: Q6.D 1191.77,571.54 V.1@1281.54,571.54 ; V.1@1281.71,571.61 V.1@1321.71,571.61
  Bottom Layer w11.81: R13.2 644.02,624.68 667.24,624.68 v1(667.56,624.36) ; v1(773.08,555) 780,555 784.02,559.02 v1(935,559.02)
OUTW: C11.2 Q1.26 Q4.S Q7.D R14.2 W.1 | length 819.1
  Top Layer w11.81: Q1.26 855.79,461.42 881.38,435.83 C11.2@881.38,425 ; v1(880,425) 885,420 C11.2 891.22,415.08 891.22,403.78 975,320 1183.31,320 Q7.D ; Q4.S Q4.S@1106.61,147.6
  Top Layer w19.68: Q4.S@1106.61,147.6 1145,185.98 1145,265 1182.4,302.4 1182.4,314.02 Q7.D@1183.39,315
  Top Layer w47.24: Q7.D W.1 W.1@1325,315
  Bottom Layer w11.81: R14.2 880,453.7 v1(880,425)
SCK: Q1.16 SCK.1 U4.4 | length 429.4
  Top Layer w10: U4.4 340,245 351.72,256.72 380,256.72 486.72,256.72 525.37,295.37 565.37,295.37 650.44,380.44 650.44,412.84 Q1.16
VBUS: 12V.1 C1.1 C1P.1 C2P.1 C13.1 C14.1 Q1.8 Q2.D Q3.D Q4.D R3.2 U3.1 U3.2 | length 2371.9
  Top Layer w11.81: 472.06,518.35 476.01,518.35 479.95,522.28 542.4,522.28 544.21,520.47 547.57,520.47 Q1.8
  Top Layer w27.56: v1(385,521.89) 388.54,518.35 415,518.35 472.06,518.35
  Top Layer w47.24: 277.86,812.14 277.94,812.22 332.88,812.22 C1.1@335.67,815 ; C1.1@330,822.6 C1.1@337.6,815 ; C1.1@342.6,815 405,815 ; v1(385,521.89) 385,665.97 397.68,678.65 397.68,717.57 400,719.9 400,869.66 430,899.66 v1(430,955)
  Bottom Layer w47.24: v1@425,955 v1(430,955) 505,955 507.26,957.26 955.34,957.26 C14.1 962.4,955 1130,955 1185,955 ; v1(1185,185) v1(1185,445) v1(1185,705) 1185,955 ; 12V.1 1250.48,954.52 1185.48,954.52 1185,955
  other v1: 1210,185 1210,445 415,515 1210,705 430,923.23
VDD: 3V3.1 C4.1 C5.2 C12.1 C15.2 C16.1 C18.1 C21.1 L1.1 Q1.10 Q1.48 R2.1 R17.2 U1.5 U2.5 U4.6 U4.8 | length 3105
  Top Layer w10: C15.2@55,540 96.38,540 C16.1@115,521.38 ; C16.1@115,508.11 C16.1 ; U1.5 C21.1 292.4,55 303.7,66.3 C4.1 ; L1.1 L1.1@237.76,583.46 ; U4.8 265.12,150.12 265.12,134.88 275,125 300,125 ; U4.6 312.52,150.12 312.52,137.52 300,125 ; R2.1 440,694.02 v1(440.98,695) ; 484,461 509.4,461 529.49,481.1 Q1.10 563.54,480.76 593.24,480.76 v1(594.2,479.79) ; v1(555,690) v1@556.59,688.41 ; 583.84,687.45 591.62,687.45 591.73,687.57 Q1.48 ; R17.2 782.4,137.4 695,137.4 697.6,140 697.6,182.92 696.11,184.41 U2.5 622.97,184.41 603.56,165 520,165 396.69,41.69 354.99,41.69 326.69,69.99 326.69,77.01 C4.1 ; 300,125 303.7,121.3 C4.1
  Top Layer w23.62: C16.1@115,508.11 126.81,496.3 133.7,496.3 170,460 344.55,460 354.86,449.68 478.21,449.68 484,455.47 ; C16.1 229.88,515 237.76,522.87 L1.1
  Top Layer w27.56: C16.1@115,508.11 105.16,498.27 105.16,470.16 70,435 70,430 12.91,372.91 12.91,31.14 29.06,15 181.26,15 197.4,31.14 C21.1 ; C16.1 115,521.38 115,521.89 124.84,531.73 131.73,531.73 150,550 180,550 180,683.86 196.14,700 335,700 v1(345,690) ; v1@556.59,688.41 582.89,688.41 583.84,687.45
  Bottom Layer w19.68: v1(345,690) 434.92,690 439.92,695 v1(440.98,695) ; v1@440.98,690 v1(555,690)
VSENSE: C17.1 Q1.13 R3.1 R4.2 TX.1 | length 421.2
  Top Layer w10: TX.1 457.07,357.93 460,355 525,355 572.02,402.02 590.9,402.02 591.73,402.85 Q1.13
  Bottom Layer w10: R4.2@380,371.3 381.85,373.15 438.15,373.15 TX.1 ; R3.1 440,452.6 TX.1 ; C17.1@495,371.3 493.15,373.15 441.85,373.15 TX.1
pads on no net: Q1.43 U1.1 U3.7

## Polygon pours and split planes (outlines as drawn)
GND on Bottom Layer "GND_L02_P001" (solid, remove dead copper, pour order 1): 0,1010 1355,1010 1360,1005 1360,0 0,0 -2.5,2.5
GND on Top Layer "GND_L01_P000" (solid, remove dead copper, pour order 0): -2.5,2.5 0,5 0,1010 1355,1010 1360,1005 1360,0

## Other copper
Top Layer:
  region net NetQ5_S: 1085.74,807.5 1085.74,817.32 1102.69,817.32 1110.74,825.37 1135.74,825.37 1135.74,805.37 1120.74,790.37 1115.74,790.37
  region net NetQ5_S: 1085.74,543.09 1085.74,552.91 1102.69,552.91 1110.74,560.96 1135.74,560.96 1135.74,540.96 1120.74,525.96 1115.74,525.96
  region net NetQ5_S: 1085,287.13 1085,296.95 1101.95,296.95 1110,305 1135,305 1135,285 1120,270 1115,270

## Silkscreen, mask and mechanical layers (free items; w line width, h text height)
Top Paste:
  circle w19.68: c65,180 r9.84
  circle w19.68: c1325,970 r9.84
Bottom Paste:
  circle w19.68: c65,180 r9.84
  circle w19.68: c1325,970 r9.84